# Altium PCB driver.PcbDoc
Units mil, origin at the board's own origin, x right, y up, seen from the top; angles counter-clockwise.
Board outline 6000 x 4000 mil, 2 copper layers (Top Layer, Bottom Layer); 169 components, 115 nets, 486 pads, 583 vias.
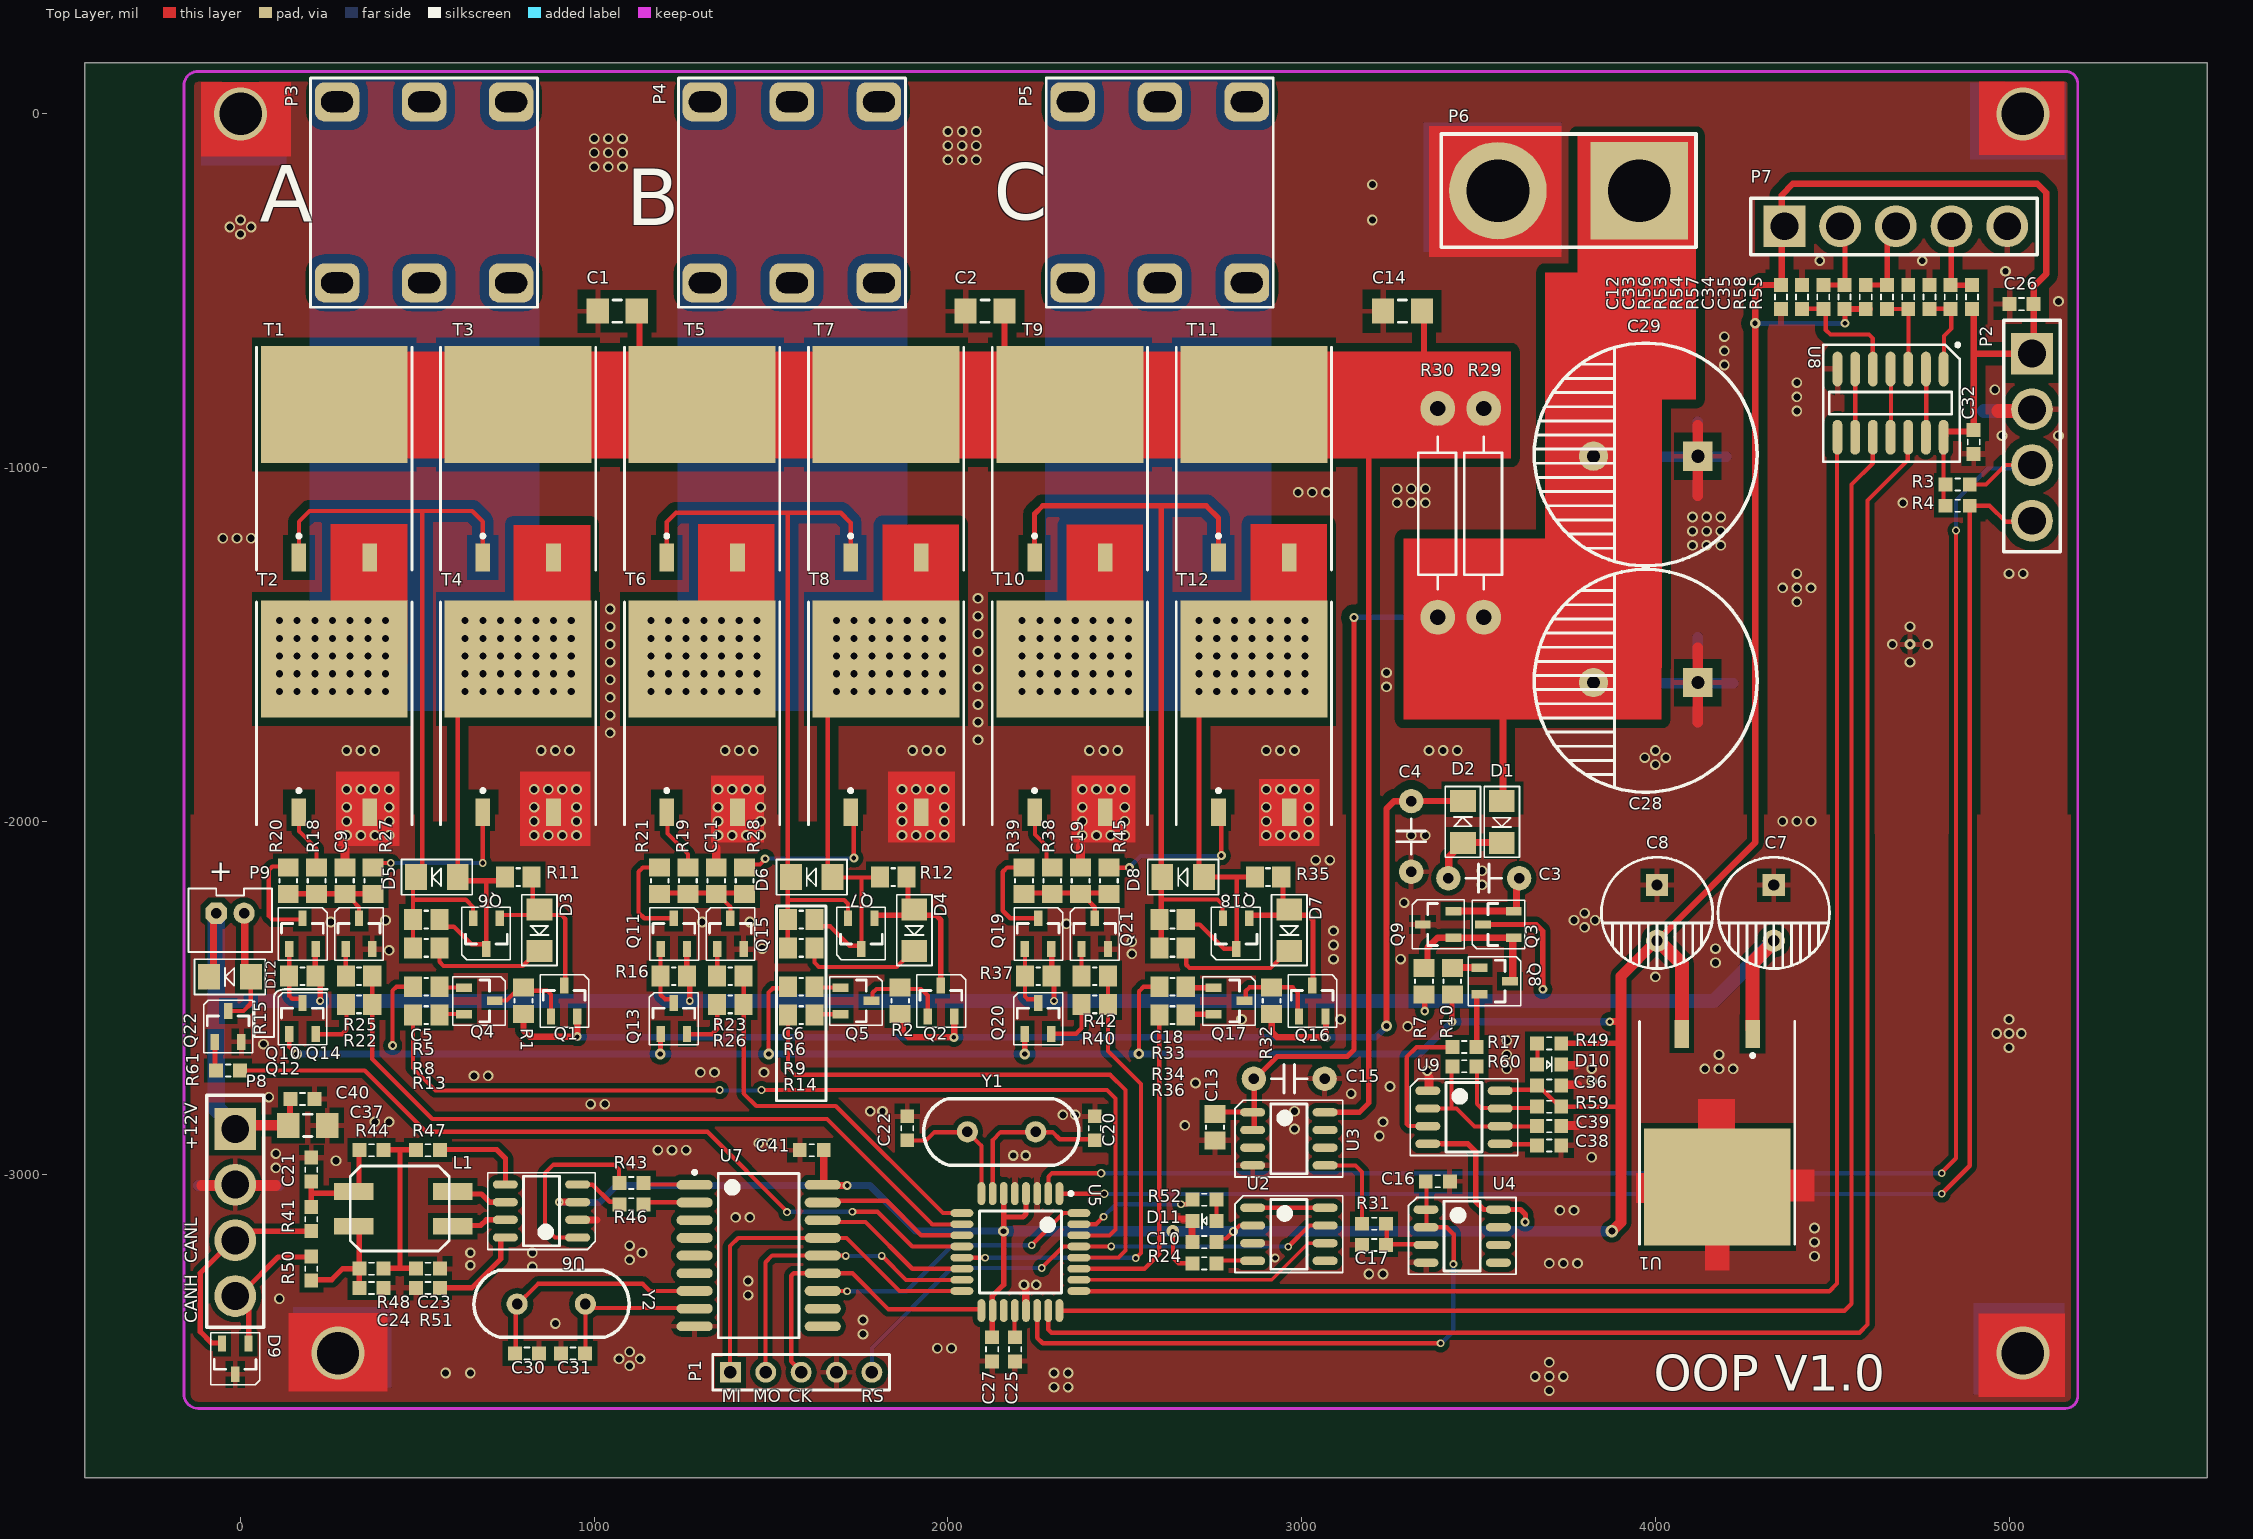
[diagram p0: Top Layer view]
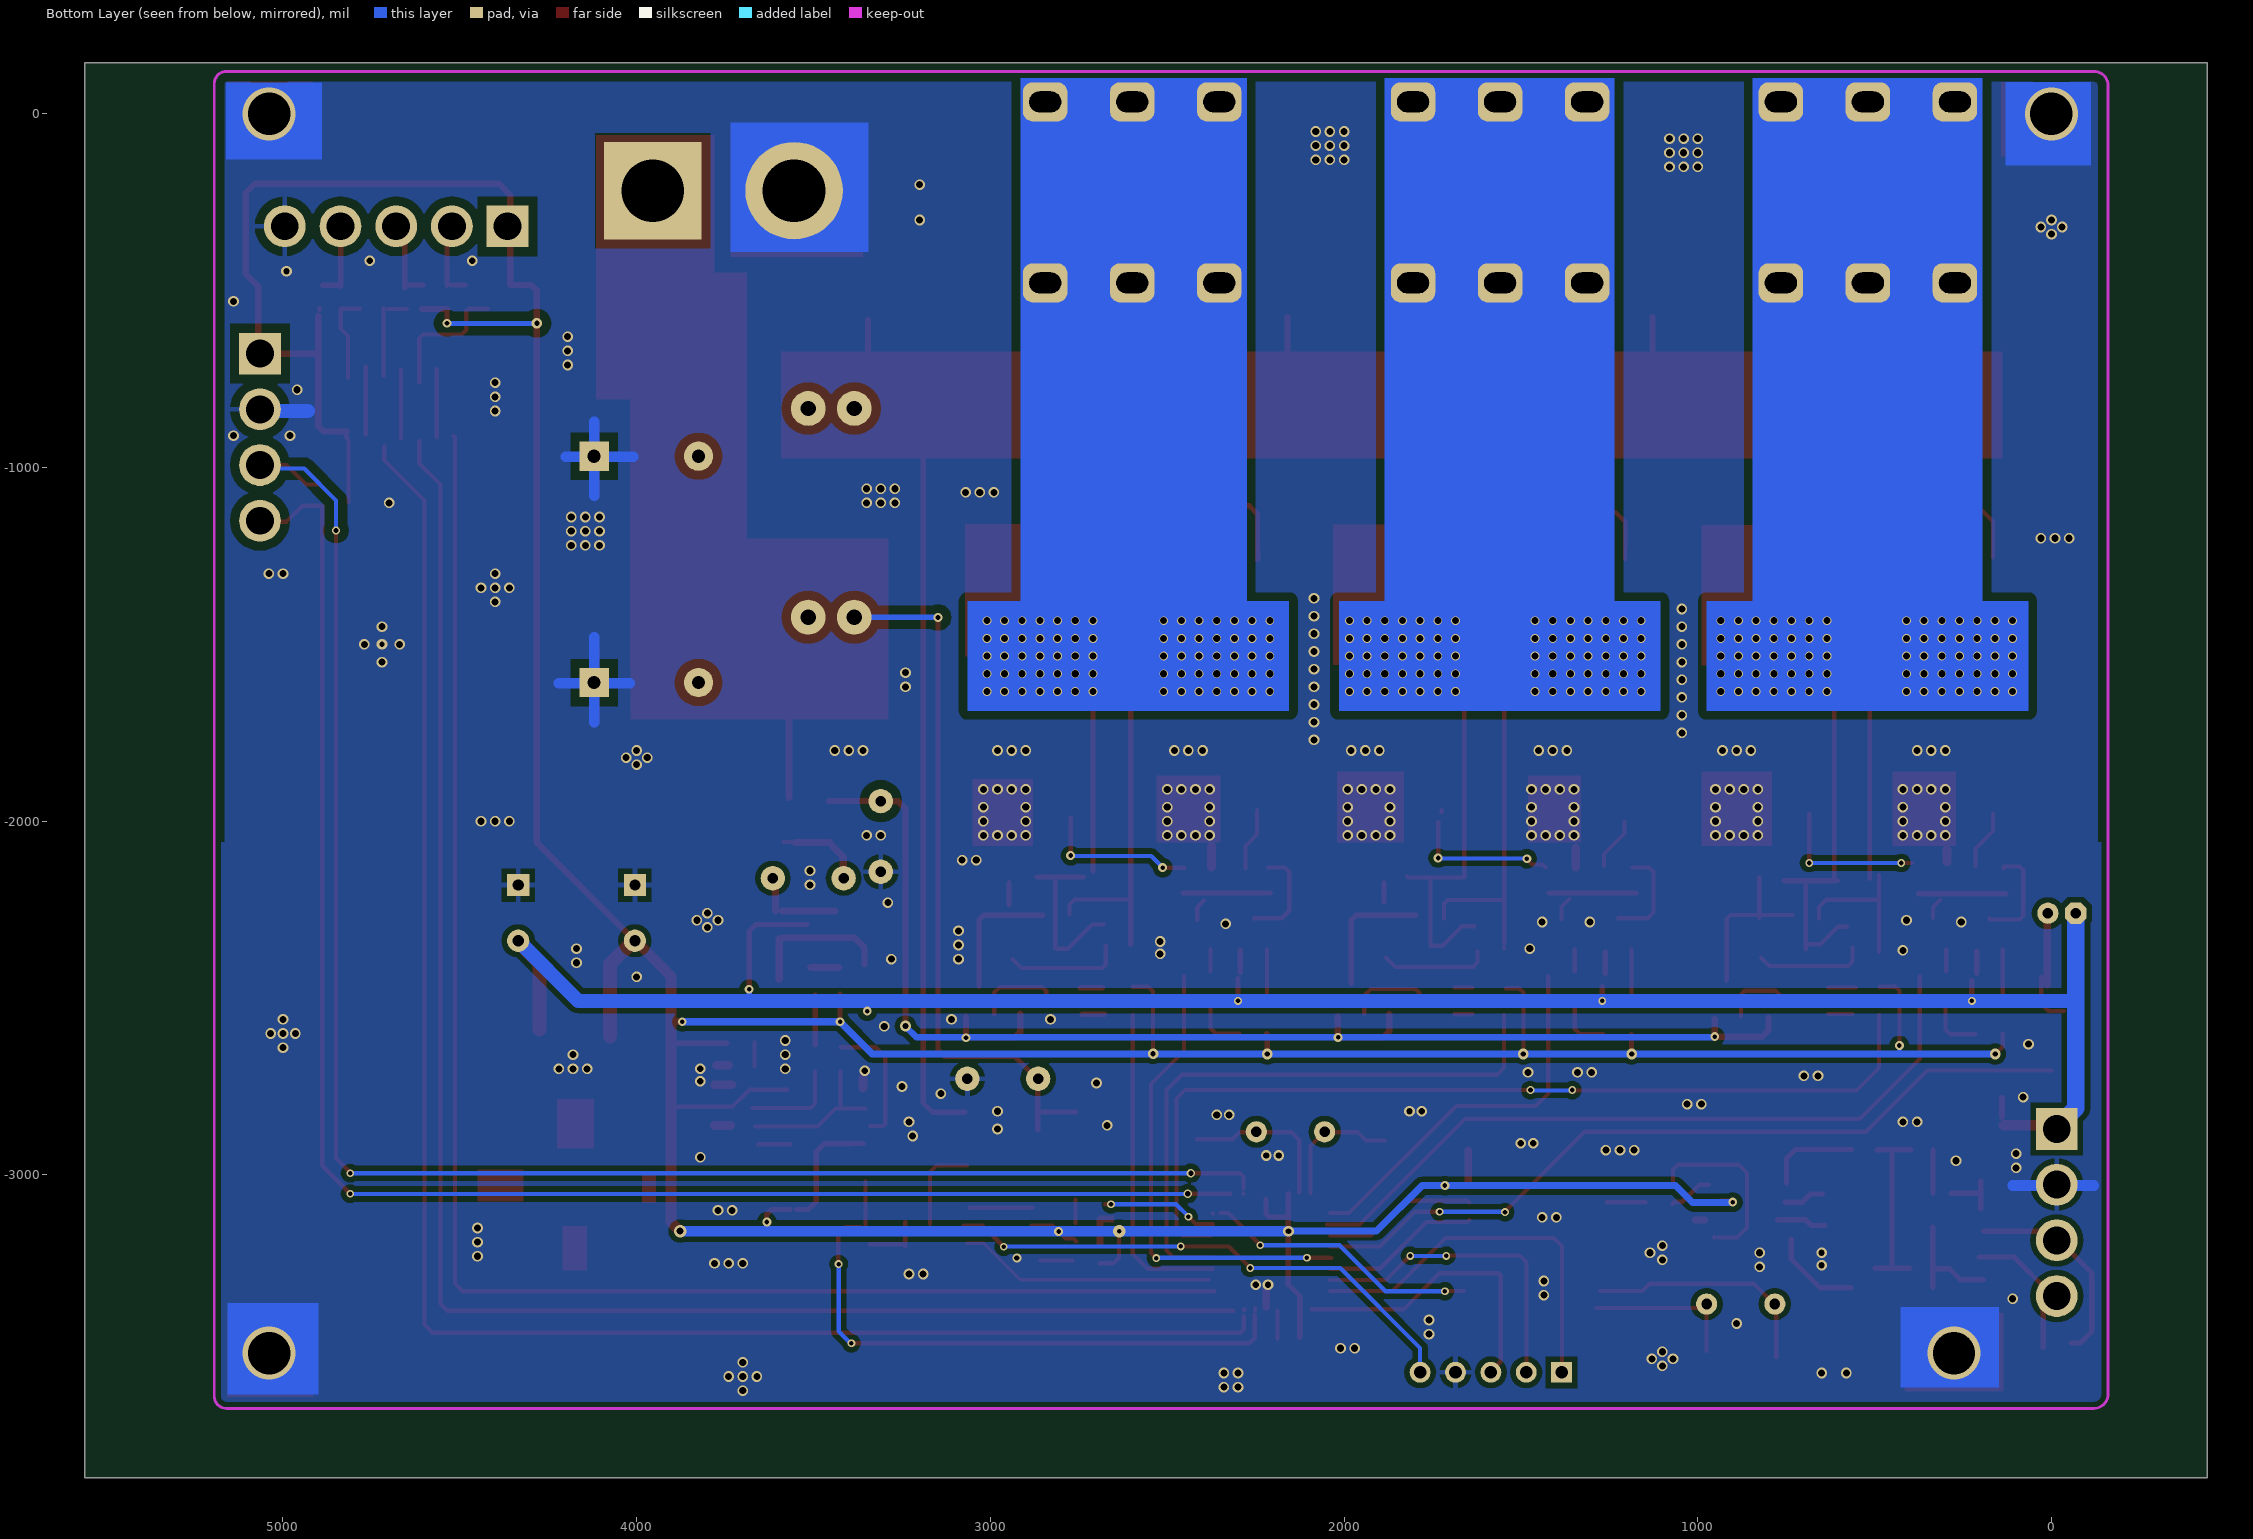
[diagram p1: Bottom Layer view, seen from below]

## Layer stack, top to bottom
Top Layer: signal copper 1.4
Dielectric: dielectric 12.6, FR-4, Dk 4.8
Bottom Layer: signal copper 1.4

## Board outline
-440,-3856 5560,-3856 5560,144 -440,144

## Design rules (kind name [scope] priority, off if disabled: settings)
Clearance [All] p1 off: gap=13.78
ComponentClearance [All] p1: gap=0 collisioncheckmode=3 verticalgap=0
HoleSize [All] p1: absolutevalues=TRUE maxlimit=200 minlimit=1 maxpercent=80.000 minpercent=20.000
PolygonConnect [All] p1: connectstyle=Relief reliefconductorwidth=15 reliefentries=4 polygonreliefangle="90 Angle"
RoutingVias [All] p1: holewidth=13 width=22 viastyle="Through Hole" minholewidth=10 minwidth=15 maxholewidth=200 maxwidth=250
SolderMaskExpansion [All] p1: expansion=4
TestPointUsage [All] p1: valid=0 allowmultiple=FALSE
Testpoint [All] p1: side=15 testpointundercomponent=TRUE minsize=40 maxsize=100 preferedsize=60 minholesize=0 maxholesize=40 preferedholesize=32 testpointgrid=1 style=1023 order=0-112345678
Width [All] p1: maxlimit=150 minlimit=10 preferedwidth=10 minimp=50.000000 maximp=50.000000 favimp=50.000000
17 further rules are at their usual default settings.

## Components (designator, comment, footprint, x,y, rotation, side; value= is the part's Value field where it differs from the comment)
C1 "Cap" 3216[1206] 1065,-558 r180 top
C2 "Cap" 3216[1206] 2105,-558 r180 top
C3 "Cap" C-5.08 3415,-2161 r0 top
C4 "Cap" C-5.08 3310,-1943 r270 top
C5 "Cap" R0805 525,-2278 r0 top
C6 "Cap" R0805 1585,-2278 r0 top
C7 "Cap Pol1" C8X4 4335,-2338 r90 top
C8 "Cap Pol1" C8X4 4005,-2338 r90 top
C9 "Cap" R0805 295,-2168 r270 top
C10 "Cap" 0603 2725,-3190 r0 top
C11 "Cap" R0805 1345,-2168 r270 top
C12 "Cap" 0603 4355,-518 r90 top
C13 "Cap" R0805 2755,-2865 r90 top
C14 "Cap" 3216[1206] 3285,-558 r180 top
C15 "Cap" C-5.08 2865,-2728 r0 top
C16 "Cap" 0603 3385,-3018 r180 top
C17 "Cap" 0603 3205,-3198 r0 top
C18 "Cap" R0805 2635,-2278 r0 top
C19 "Cap" R0805 2375,-2168 r270 top
C20 "Cap" 0603 2415,-2868 r90 top
C21 "Cap" 0603 200,-2985 r270 top
C22 "Cap" 0603 1885,-2868 r90 top
C23 "Cap" 0603 530,-3265 r180 top
C24 "Cap" 0603 370,-3320 r180 top
C25 "Cap" 0603 2190,-3493 r270 top
C26 "Cap" 0603 5035,-538 r0 top
C27 "Cap" 0603 2125,-3493 r90 top
C28 "Cap Pol1" C16-7.5 3825,-1608 r0 top
C29 "Cap Pol1" C16-7.5 3825,-968 r0 top
C30 "Cap" 0603 810,-3505 r0 top
C31 "Cap" 0603 940,-3505 r180 top
C32 "Cap" 0603 4900,-928 r270 top
C33 "Cap" 0603 4415,-518 r270 top
C34 "Cap" 0603 4715,-518 r270 top
C35 "Cap" 0603 4775,-518 r270 top
C36 "Cap" 0603 3700,-2747 r0 top
C37 "Cap" 3216[1206] 190,-2860 r0 top
C38 "Cap" 0603 3700,-2917 r0 top
C39 "Cap" 0603 3700,-2862 r0 top
C40 "Cap" 0603 175,-2785 r180 top
C41 "Cap" 0603 1615,-2930 r0 top
D1 "Diode" LL34 3566,-2002 r270 top
D2 "Diode" LL34 3456,-2002 r90 top
D3 "Diode" LL34 845,-2308 r270 top
D4 "Diode" LL34 1905,-2308 r270 top
D5 "Zener diode" LL34 555,-2158 r180 top
D6 "Zener diode" LL34 1615,-2158 r180 top
D7 "Diode" LL34 2965,-2308 r270 top
D8 "Zener diode" LL34 2665,-2158 r180 top
D9 "NUP2105L" SOT-23-NPN -15,-3520 r180 top
D10 "WORK" 0603-LED 3700,-2688 r0 top
D11 "FALT" 0603-LED 2725,-3130 r180 top
D12 "Diode" LL34 -30,-2440 r180 top
L1 "B82793S0513N" B82793S0513N201 600,-3145 r180 top
P1 "PROG" HDR1X5 1385,-3558 r0 top
P2 "ENC" 4P-4mm 5065,-678 r270 top
P3 "M5" M5 765,-478 r90 top
P4 "M5" M5 1805,-478 r90 top
P5 "M5" M5 2845,-478 r90 top
P6 "POW" MG7.62-2P 3620,-225 r0 top
P7 "HALL" 5P-4.0 4365,-318 r0 top
P8 "CAN" 4P-4mm -15,-2870 r270 top
P9 "FAN" PH2.0-2P 10,-2260 r0 top
Q1 "PNP" SOT-23-PNP 915,-2508 r0 top
Q2 "PNP" SOT-23-PNP 1980,-2508 r0 top
Q3 "NPN" SOT-23-NPN 3556,-2292 r90 top
Q4 "NPN" SOT-23-NPN 675,-2508 r270 top
Q5 "NPN" SOT-23-NPN 1740,-2508 r270 top
Q6 "PNP" SOT-23-PNP 695,-2318 r180 top
Q7 "PNP" SOT-23-PNP 1755,-2318 r180 top
Q8 "NPN" SOT-23-NPN 3546,-2452 r270 top
Q9 "PNP" SOT-23-PNP 3386,-2292 r90 top
Q10 "PNP" SOT-23-PNP 175,-2318 r0 top
Q11 "PNP" SOT-23-PNP 1225,-2318 r0 top
Q12 "NPN" SOT-23-NPN 175,-2558 r0 top
Q13 "NPN" SOT-23-NPN 1225,-2558 r0 top
Q14 "NPN" SOT-23-NPN 335,-2318 r0 top
Q15 "NPN" SOT-23-NPN 1385,-2318 r0 top
Q16 "PNP" SOT-23-PNP 3030,-2508 r0 top
Q17 "NPN" SOT-23-NPN 2795,-2508 r270 top
Q18 "PNP" SOT-23-PNP 2815,-2318 r180 top
Q19 "PNP" SOT-23-PNP 2255,-2318 r0 top
Q20 "NPN" SOT-23-NPN 2255,-2558 r0 top
Q21 "NPN" SOT-23-NPN 2415,-2318 r0 top
Q22 "NPN" SOT-23-NPN -35,-2580 r0 top
R1 "Res1" R0805 800,-2508 r270 top
R2 "Res1" R0805 1865,-2508 r270 top
R3 "Res1" 0603 4855,-1048 r0 top
R4 "Res1" 0603 4855,-1108 r0 top
R5 "Res1" R0805 525,-2358 r180 top
R6 "Res1" R0805 1585,-2358 r180 top
R7 "Res1" R0805 3346,-2452 r270 top
R8 "Res1" R0805 525,-2468 r180 top
R9 "Res1" R0805 1585,-2468 r180 top
R10 "Res1" R0805 3426,-2452 r270 top
R11 "Res1" R0805 785,-2158 r0 top
R12 "Res1" R0805 1845,-2158 r0 top
R13 "Res1" R0805 525,-2548 r0 top
R14 "Res1" R0805 1585,-2548 r0 top
R15 "Res1" R0805 175,-2438 r180 top
R16 "Res1" R0805 1225,-2438 r180 top
R17 "Res1" 0603 3460,-2638 r0 top
R18 "Res1" R0805 215,-2168 r270 top
R19 "Res1" R0805 1265,-2168 r270 top
R20 "Res1" R0805 135,-2168 r270 top
R21 "Res1" R0805 1185,-2168 r270 top
R22 "Res1" R0805 335,-2518 r180 top
R23 "Res1" R0805 1385,-2518 r180 top
R24 "Res1" 0603 2725,-3250 r180 top
R25 "Res1" R0805 335,-2438 r0 top
R26 "Res1" R0805 1385,-2438 r0 top
R27 "Res1" R0805 375,-2168 r270 top
R28 "Res1" R0805 1425,-2168 r270 top
R29 "" R15-1MM 3515,-928 r270 top
R30 "" R15-1MM 3385,-928 r270 top
R31 "Res1" 0603 3205,-3138 r180 top
R32 "Res1" R0805 2915,-2508 r270 top
R33 "Res1" R0805 2635,-2358 r180 top
R34 "Res1" R0805 2635,-2468 r180 top
R35 "Res1" R0805 2905,-2158 r0 top
R36 "Res1" R0805 2635,-2548 r0 top
R37 "Res1" R0805 2255,-2438 r180 top
R38 "Res1" R0805 2295,-2168 r270 top
R39 "Res1" R0805 2215,-2168 r270 top
R40 "Res1" R0805 2415,-2518 r180 top
R41 "Res Semi" 0603 200,-3125 r90 top
R42 "Res1" R0805 2415,-2438 r0 top
R43 "Res Semi" 0603 1105,-3023 r0 top
R44 "Res Semi" 0603 370,-2930 r0 top
R45 "Res1" R0805 2455,-2168 r270 top
R46 "Res Semi" 0603 1105,-3083 r180 top
R47 "Res Semi" 0603 530,-2930 r180 top
R48 "Res Semi" 0603 370,-3265 r0 top
R49 "Res1" 0603 3700,-2628 r0 top
R50 "Res Semi" 0603 200,-3265 r270 top
R51 "Res Semi" 0603 530,-3320 r0 top
R52 "Res1" 0603 2725,-3070 r180 top
R53 "Res Semi" 0603 4535,-518 r270 top
R54 "Res Semi" 0603 4595,-518 r270 top
R55 "Res Semi" 0603 4895,-518 r270 top
R56 "Res Semi" 0603 4475,-518 r90 top
R57 "Res Semi" 0603 4655,-518 r90 top
R58 "Res Semi" 0603 4835,-518 r90 top
R59 "Res1" 0603 3700,-2807 r0 top
R60 "Res1" 0603 3460,-2693 r0 top
R61 "Res Semi" 0603 -35,-2705 r0 top
T1 "CSD19536" D2PAK 265,-1038 r0 top
T2 "CSD19536" D2PAK 265,-1758 r0 top
T3 "CSD19536" D2PAK 785,-1038 r0 top
T4 "CSD19536" D2PAK 785,-1758 r0 top
T5 "CSD19536" D2PAK 1305,-1038 r0 top
T6 "CSD19536" D2PAK 1305,-1758 r0 top
T7 "CSD19536" D2PAK 1825,-1038 r0 top
T8 "CSD19536" D2PAK 1825,-1758 r0 top
T9 "CSD19536" D2PAK 2345,-1038 r0 top
T10 "CSD19536" D2PAK 2345,-1758 r0 top
T11 "CSD19536" D2PAK 2865,-1038 r0 top
T12 "CSD19536" D2PAK 2865,-1758 r0 top
U1 "L7805ACD2T-TR" D2PAK 4175,-2818 r180 top
U2 "MAX706RCSA" SOIC8 2965,-3168 r0 top
U3 "MAX4080T" SOIC8 2965,-2898 r0 top
U4 "LM358D" SOIC8 3455,-3173 r0 top
U5 "ATmega8-16AC" 32A_N 2205,-3218 r270 top
U6 "TJA1040" SOIC8 850,-3102 r180 top
U7 "MCP2515" WSO18_M 1465,-3228 r0 top
U8 "MC74HC14AD" 751A 4665,-818 r270 top
U9 "NE555D" SOIC8 3460,-2837 r0 top
Y1 "XTAL" 49SD 2055,-2878 r0 top
Y2 "XTAL(16M)" 49SD 975,-3365 r180 top

## Footprints (in the part's own frame and the unit in brackets; to place one, negate y for a bottom-side part, rotate by r counter-clockwise, add the part's x,y. Pads: shape width x height; smd on the part's side, far side on the other; paste and mask are expansions set on the pad)
4P-4mm [mm]
  rect 3x3 hole 2: 1(0,0)
  round 3 hole 2: 2(4,0) 3(8,0) 4(12,0)
  silkscreen extent -2.4,-2.03 14.22,2.03
5P-4.0 [mm]
  rect 3x3 hole 2: 1(0,0)
  round 3 hole 2: 2(4,0) 3(8,0) 4(12,0) 5(16,0)
  silkscreen extent -2.4,-2.03 18.16,2.03
32A_N [mm] "32-Pin Thin Quad Flat Pack 0.8 mm Pitch, IPC Medium Density"
  oval 1.65x0.55 smd: 1(-4.2,2.8) 2(-4.2,2) 3(-4.2,1.2) 4(-4.2,0.4) 5(-4.2,-0.4) 6(-4.2,-1.2) 7(-4.2,-2) 8(-4.2,-2.8) 17(4.2,-2.8) 18(4.2,-2) 19(4.2,-1.2) 20(4.2,-0.4) 21(4.2,0.4) 22(4.2,1.2) 23(4.2,2) 24(4.2,2.8)
  oval 0.55x1.65 smd: 9(-2.8,-4.2) 10(-2,-4.2) 11(-1.2,-4.2) 12(-0.4,-4.2) 13(0.4,-4.2) 14(1.2,-4.2) 15(2,-4.2) 16(2.8,-4.2) 25(2.8,4.2) 26(2,4.2) 27(1.2,4.2) 28(0.4,4.2) 29(-0.4,4.2) 30(-1.2,4.2) 31(-2,4.2) 32(-2.8,4.2)
  silkscreen extent -4.32,-2.95 2.95,3.75, body extent -3.5,-3.5 3.5,3.5, height 1.2
49SD [mil]
  round 60 hole 30: 1(0,0) 2(193,0)
  silkscreen extent -124,-95 315,94
0603 [mm]
  rect 1x1 smd: 1(-0.864,0) 2(0.864,0)
  silkscreen extent -0.18,-0.43 0.18,0.43
0603-LED [mm]
  rect 1x1 smd: 1(-0.864,0) 2(0.864,0)
  silkscreen extent -0.18,-0.51 0.18,0.56
751A [mm]
  oval 2.5x0.7 smd: 1(-2.45,3.81) 2(-2.45,2.54) 3(-2.45,1.27) 4(-2.45,0) 5(-2.45,-1.27) 6(-2.45,-2.54) 7(-2.45,-3.81) 8(2.45,-3.81) 9(2.45,-2.54) 10(2.45,-1.27) 11(2.45,0) 12(2.45,1.27) 13(2.45,2.54) 14(2.45,3.81)
  silkscreen extent -4.31,-4.83 4.19,4.95, body extent -2,-4.38 2,4.38, height 1.75
3216[1206] [mm] "Chip Resistor; Body 3.2 x 1.6 mm (LxW typ)"
  rect 1.6x1.8 smd: 1(-1.4,0) 2(1.4,0)
  silkscreen extent -0.3,-0.8 0.3,0.8
B82793S0513N201 [mm]
  rect 2.85x1.2 smd: 1(0,0) 2(0,-2.5) 3(7.112,-2.5) 4(7.112,0)
  silkscreen extent 0.25,-4.32 7.37,1.78
C8X4 [mm]
  round 1.6 hole 0.8: 1(0,0)
  rect 1.6x1.6 hole 0.8: 2(4,0)
  silkscreen extent -2,-4 6,4
C16-7.5 [mm]
  round 2.1 hole 0.95: 1(0,0)
  rect 2.1x2.1 hole 0.95: 2(7.5,0)
  silkscreen extent -4.25,-7.87 11.75,8.12
C-5.08 [mm]
  round 1.75 hole 0.75: 1(0,0) 2(5.08,0)
  silkscreen extent 1.27,-1.02 3.81,1.02
D2PAK [mm] "D2-PAK/TO-263-AB; 3 Leads (1 Cropped); Body 15.5 (inc. leads) x 10.5 mm (LxW max)"
  rect 1.05x2 smd: 1(-2.54,-5.5) 3(2.54,-5.5)
  rect 10.55x8.4 smd: 2(0,5.5)
  silkscreen extent -5.58,-6.4 5.58,9.6
HDR1X5 [mm] "Connector; Header; 5 Position"
  rect 1.5x1.5 hole 0.9: 1(0,0)
  round 1.5 hole 0.9: 2(2.54,0) 3(5.08,0) 4(7.62,0) 5(10.16,0)
  silkscreen extent -1.27,-1.27 11.43,1.27
LL34 [mm] "MELF Diode, 2-Leads, Body 3.3x1.6mm, IPC Medium Density"
  rect 1.575x1.85 smd: 1(-1.5,0) 2(1.5,0)
  silkscreen extent -2.54,-1.27 2.54,1.27, body extent -1.65,-0.82 1.65,0.82, height 1.65
M5 [mm]
  rrect50% 2.8x3.2 hole 1.5 slot 2.3 at 90 deg: 1(0,12.5) 1(0,6.25) 1(0,0) 1(13,12.5) 1(13,0) 1(13,6.25)
  silkscreen extent -1.75,-1.91 14.71,14.4
MG7.62-2P [mm]
  round 7 hole 4.5: 1(-1.651,0.203)
  rect 7x7 hole 4.5: 2(8.509,0.203)
  silkscreen extent -5.71,-3.86 12.57,4.27
PH2.0-2P [mil]
  oct 60x60 hole 30: 1(-78.74,0)
  round 60 hole 30: 2(0,0)
  silkscreen extent -157,-110 79,70
R15-1MM [mm]
  round 2.5 hole 1.1: 1(-2.413,0) 2(12.573,0)
  silkscreen extent -0.38,-1.4 10.55,1.3
R0805 [mm] "Chip Resistor, 2-Leads, Body 2.0x1.3mm, IPC Medium Density"
  rect 1.298x1.501 smd: 1(-0.95,0) 2(0.95,0)
  silkscreen extent -0.13,-0.64 0.13,0.64
SOIC8 [mm]
  oval 1.8x0.6 smd: 1(-2.625,1.905) 2(-2.625,0.635) 3(-2.625,-0.635) 4(-2.625,-1.905) 5(2.575,-1.905) 6(2.575,-0.635) 7(2.575,0.635) 8(2.575,1.905)
  silkscreen extent -3.89,-2.74 3.84,2.77, body extent -2.03,-2.5 1.97,2.5, height 1.76
SOT-23-NPN [mm]
  rect 0.6x1.143 smd: 1(0.95,-1.108) 2(-0.95,-1.108) 3(0,1.108)
  silkscreen extent -1.75,-1.89 1.75,1.87, body extent -1.5,-0.66 1.5,0.74, height 1.1
SOT-23-PNP [mm]
  rect 0.6x1.143 smd: 1(0.95,-1.108) 2(-0.95,-1.108) 3(0,1.108)
  silkscreen extent -1.73,-1.89 1.78,1.87, body extent -1.5,-0.66 1.5,0.74, height 1.1
WSO18_M [mm] "SOIC, 18-Leads, Body 11.6x7.5mm, Pitch 1.27mm, IPC Low Density"
  oval 2.6x0.7 smd: 1(-4.6,5.08) 2(-4.6,3.81) 3(-4.6,2.54) 4(-4.6,1.27) 5(-4.6,0) 6(-4.6,-1.27) 7(-4.6,-2.54) 8(-4.6,-3.81) 9(-4.6,-5.08) 10(4.6,-5.08) 11(4.6,-3.81) 12(4.6,-2.54) 13(4.6,-1.27) 14(4.6,0) 15(4.6,1.27) 16(4.6,2.54) 17(4.6,3.81) 18(4.6,5.08)
  silkscreen extent -4.72,-5.9 2.9,6.1, body extent -3.8,-5.95 3.8,5.95, height 2.65

## Part data
C1 C2 C3 C4 C5 C6 C9 C10 C11 C12 C13 C14 C15 C16 C17 C18 C19 C20 C21 C22 C23 C24 C25 C26 C27 C30 C31 C32 C33 C34 C35 C36 C37 C38 C39 C40 C41: "Capacitor"
C7 C8 C28 C29: "Polarized Capacitor (Radial)"
D1 D2 D3 D4 D7 D12: library part "Diode 1N5408", "3 Amp Medium Power Silicon Rectifier Diode"
D5 D6 D8: library part "D Zener", "Zener Diode"
D10 D11: library part LED2, "Typical RED, GREEN, YELLOW, AMBER GaAs LED"
L1: library part B82793S0513N201
P1 P7: library part "Header 5", "Header, 5-Pin"
P2 P8: library part "Header 4", "Header, 4-Pin"
P6 P9: library part "Header 2", "Header, 2-Pin"
Q1 Q2 Q6 Q7 Q9 Q10 Q11 Q16 Q18 Q19: library part 2N5401, "PNP General Purpose Amplifier"
Q3 Q4 Q5 Q8 Q12 Q13 Q14 Q15 Q17 Q20 Q21 Q22: library part 2N5551, "NPN General Purpose Amplifier"
R1 R2 R3 R4 R5 R6 R7 R8 R9 R10 R11 R12 R13 R14 R15 R16 R17 R18 R19 R20 R21 R22 R23 R24 R25 R26 R27 R28 R31 R32 R33 R34 R35 R36 R37 R38 R39 R40 R42 R45 R49 R52 R59 R60: "Resistor"
R29 R30: library part Res1, "Resistor"
R41 R43 R44 R46 R47 R48 R50 R51 R53 R54 R55 R56 R57 R58 R61: "Semiconductor Resistor"
T1 T2 T3 T4 T5 T6 T7 T8 T9 T10 T11 T12: library part IRF644S, "HEXFET N-Channel Power MOSFET"
U1: library part MC78M05ACDTRK, "Three-Terminal Medium Current Positive Voltage Regulator"
U2: "+3V Voltage Monitoring, Low-Cost, µP Supervisory Circuit"
U3: library part MAX4080
U4: "Dual Low-Power Operational Amplifier"
U5: "8-Bit AVR Microcontroller with 8K Bytes of In-System Programmable Flash Memory"
U8: "Hex Schmitt-Trigger Inverter"
U9: "Precision Timer"
Y1: "Crystal Oscillator"
Y2: library part XTAL, "Crystal Oscillator"

## Via types
v1: diameter 30, hole 20, Top Layer to Bottom Layer, 296 vias
v2: diameter 25, hole 20, Top Layer to Bottom Layer, 210 vias
v3: diameter 22, hole 13, Top Layer to Bottom Layer, 25 vias
v4: diameter 30, hole 18, Top Layer to Bottom Layer, 16 vias
v5: diameter 25, hole 13, Top Layer to Bottom Layer, 16 vias
v6: diameter 30, hole 15, Top Layer to Bottom Layer, 7 vias
v7: diameter 150, hole 120, Top Layer to Bottom Layer, 4 vias
v8: diameter 25, hole 15, Top Layer to Bottom Layer, 2 vias
v9: diameter 24, hole 15, Top Layer to Bottom Layer, 2 vias
v10: diameter 25, hole 14, Top Layer to Bottom Layer, 1 vias
v11: diameter 35, hole 13, Top Layer to Bottom Layer, 1 vias
v12: diameter 35, hole 20, Top Layer to Bottom Layer, 1 vias
v13: diameter 30, hole 16, Top Layer to Bottom Layer, 1 vias
v14: diameter 30, hole 17, Top Layer to Bottom Layer, 1 vias

## Nets (pads, with @x,y where several pads share a name; then routed paths per layer and width w, separated by ;. In a path a pad name is that pad's centre, name@x,y a point inside that pad or via, vN(x,y) a via of type N, cw(c..) or ccw(c..) an arc to the next point about the centre after c; other vN are vias at no path point)
+5V: C8.1 C10.2 C12.2 C26.2 C27.2 C32.1 C36.1 C41.2 P2.1 P7.1 Q12.2 Q13.2 Q20.2 R3.1 R4.1 R8.2 R9.2 R10.2 R24.2 R34.2 R49.2 R53.2 R54.2 R55.2 R59.2 U1.3 U2.2 U4.8 U5.4 U5.6 U5.18 U6.3 U7.18 U8.14 U9.4 U9.8 | length 15538.5
  Top Layer w12: Q12.2@137.99,-2601.64 Q12.2@138,-2601 ; Q12.2@138,-2600 138,-2638 v6@158,-2658 ; v5(430,-2634) 430,-2479 441,-2468 R8.2@486,-2468 ; v6@1493,-2657 1493,-2484 1505,-2472 R9.2@1542,-2472 ; v6@2540,-2658 2540,-2481 2553,-2468 R34.2 ; v11@2636,-3160 2636,-3234 2652,-3250 R24.2 ; C10.2@2757,-3188 2765,-3180 2787,-3180 2824,-3143 U2.2@2883,-3143 ; U9.8@3574,-2759 3681,-2759 3729,-2807 3900,-2807 ; R4.1@4815,-1098 U8.14@4815,-923
  Top Layer w15: v6@1187.6,-2658 Q13.2@1187.6,-2603 ; C27.2 2125,-3343 2157.76,-3310.24 U5.6 ; 2162.26,-3119 2212,-3119 2221,-3110 U5.4@2221,-3068 ; v6@2217.6,-2659.6 Q20.2@2217.6,-2612 ; Q20.2@2218.92,-2601.7 Q20.2@2219,-2600 ; U9.4@3359,-2911 3398,-2912 3470,-2912 3492,-2934 3492,-3075 3515,-3098 U4.8@3547,-3098 ; v5@3425,-2565 R10.2@3425,-2489.4 ; U4.8@3565,-3098 3619,-3098 3633,-3112 v5@3633,-3131 ; R49.2@3745,-2628 3895,-2628 ; v10@4536,-591 4536,-552 R53.2@4536,-551.88 ; U8.14@4820.58,-915.03 U8.14@4821,-911 ; R55.2@4896.91,-552.15 R55.2@4897,-551
  Top Layer w18: C8.1@4014,-2329 4283,-2060 4283,-499 4298,-484 C12.2@4356,-484 ; C12.2@4354.46,-480.38 C12.2@4357,-480 ; C12.2@4357,-478 4357,-230 4389,-198 5080,-198 5105,-223 5105,-453 5070,-488 P2.1@5070,-683 ; R53.2@4536,-551.88 R54.2@4606.12,-551.88 ; U8.14@4820,-898 4885,-898 4900,-883 4900,-713 ; 4900,-720 R55.2@4900,-571 ; 4903,-678 P2.1
  Top Layer w20: v5@902,-3077 U6.3@937,-3077 ; v6(1187,-2658) v6@1187.6,-2658 ; U7.18@1648.1,-3030 v5@1716,-3030 ; U7.18@1649,-3024 C41.2 ; C41.2@1649.96,-2930.04 C41.2@1650,-2929 ; v5@3871,-2566 3898,-2566
  Top Layer w25: C8.1@4003,-2338 C8.1@4003,-2337
  Top Layer w30: v12@3877,-3160 3903,-3134 3903,-2438 C8.1@4003,-2338
  Top Layer w40: C8.1@4008,-2337 4075,-2404 U1.3@4075,-2609
  Bottom Layer w12: 430,-2650 v5@430,-2633.74
  Bottom Layer w15: 3632,-3159 v5(3632,-3133) ; v6@4281,-593 v10@4536,-593
  Bottom Layer w20: v6@160,-2658 3334,-2658 v5@3426,-2566 ; v5@902,-3078 1015,-3078 1063,-3030 1779,-3030 1908,-3159 v13(2157,-3159) ; v5(3425,-2567) v5@3870,-2567
  Bottom Layer w30: v13(2157,-3159) v12@3876,-3159
  other v5: 2807,-3160 901,-3077 1715,-3030 3871,-2567
  other v6: 159,-2658 1493,-2658 2217,-2658 2540,-2657 4282,-592
  other v10: 4536,-592
  other v11: 2636,-3159
  other v12: 3877,-3159
+12V: C7.1 C37.1 C40.2 D12.2 P8.1 P9.1 Q3.3 Q10.1 Q11.1 Q19.1 R7.2 R15.1 R16.1 R37.1 U1.1 | length 6539.7
  Top Layer w15: R15.1@211.6,-2430.04 Q10.1@211.6,-2367.64 ; v3(225,-2508) R15.1@225,-2450.6 ; R16.1@1261.6,-2432.04 Q11.1@1261.6,-2369.64 ; v3(1270,-2508) 1270,-2468 ; R37.1@2293.4,-2427.36 Q19.1@2293.4,-2364.96 ; v3(2300,-2508) R37.1@2300,-2445.6 ; v5@3348,-2536 R7.2@3348,-2504 ; Q3.3@3518,-2292 3663,-2292 3682,-2311 v5@3682,-2474
  Top Layer w18: C37.1@140,-2836 C40.2@140,-2783
  Top Layer w20: D12.2@-76,-2461 P9.1@-76,-2251
  Top Layer w30: P8.1@-6,-2860 C37.1
  Top Layer w40: U1.1@4275,-2588 4275,-2400 C7.1@4334,-2341
  Bottom Layer w15: v5@3349,-2535 3349,-2508 ; 3682,-2498 v5(3682,-2475)
  Bottom Layer w40: -62.82,-2508 4165,-2508 C7.1
  Bottom Layer w50: P9.1 -68.74,-2811.26 -15,-2865 P8.1
  other v5: 3348,-2537
A: C5.2 D5.1 P3.1 Q6.3 R11.1 T1.3 T2.2 T3.3 T4.2 | length 992.9
  Top Layer w12: C5.2@579,-2298 603,-2298 653,-2348 Q6.3@694,-2348 ; D5.1@614.06,-2168 T4.2@614.06,-1654.06 ; Q6.3 695,-2168
  Top Layer w15: D5.1@606.06,-2168 R11.1@755.69,-2168
  other v2: 110,-1633 160,-1633 210,-1633 260,-1633 310,-1633 360,-1633 410,-1633 635,-1633 685,-1633 735,-1633 785,-1633 835,-1633 885,-1633 935,-1633 110,-1583 160,-1583 210,-1583 260,-1583 310,-1583 360,-1583 410,-1583 635,-1583 685,-1583 735,-1583 785,-1583 835,-1583 885,-1583 935,-1583 110,-1533 160,-1533 210,-1533 260,-1533 310,-1533 360,-1533 410,-1533 635,-1533 685,-1533 735,-1533 785,-1533 835,-1533 885,-1533 935,-1533 110,-1483 160,-1483 210,-1483 260,-1483 310,-1483 360,-1483 410,-1483 635,-1483 685,-1483 735,-1483 785,-1483 835,-1483 885,-1483 935,-1483 110,-1433 160,-1433 210,-1433 260,-1433 310,-1433 360,-1433 410,-1433 635,-1433 685,-1433 735,-1433 785,-1433 835,-1433 885,-1433 935,-1433
B: C6.2 D6.1 P4.1 Q7.3 R12.1 T5.3 T6.2 T7.3 T8.2 | length 979
  Top Layer w12: C6.2@1631,-2297 1667,-2297 1722,-2352 Q7.3@1755,-2352 ; T8.2@1660,-1682 1660,-2159 1819,-2159 R12.1@1822,-2156 ; Q7.3@1756,-2353 1756,-2161
  other v2: 1160,-1633 1210,-1633 1260,-1633 1310,-1633 1360,-1633 1410,-1633 1460,-1633 1685,-1633 1735,-1633 1785,-1633 1835,-1633 1885,-1633 1935,-1633 1985,-1633 1160,-1583 1210,-1583 1260,-1583 1310,-1583 1360,-1583 1410,-1583 1460,-1583 1685,-1583 1735,-1583 1785,-1583 1835,-1583 1885,-1583 1935,-1583 1985,-1583 1160,-1533 1210,-1533 1260,-1533 1310,-1533 1360,-1533 1410,-1533 1460,-1533 1685,-1533 1735,-1533 1785,-1533 1835,-1533 1885,-1533 1935,-1533 1985,-1533 1160,-1483 1210,-1483 1260,-1483 1310,-1483 1360,-1483 1410,-1483 1460,-1483 1685,-1483 1735,-1483 1785,-1483 1835,-1483 1885,-1483 1935,-1483 1985,-1483 1160,-1433 1210,-1433 1260,-1433 1310,-1433 1360,-1433 1410,-1433 1460,-1433 1685,-1433 1735,-1433 1785,-1433 1835,-1433 1885,-1433 1935,-1433 1985,-1433
BT_PWM: R17.1 U9.3 | length 373.1
  Top Layer w12: U9.3@3340,-2862 3303,-2862 3297,-2856 3297,-2667 3325,-2639 R17.1@3424,-2639
C: C18.2 D8.1 P5.1 Q18.3 R35.1 T9.3 T10.2 T11.3 T12.2 | length 957.8
  Top Layer w12: C18.2@2679,-2292 2712,-2292 2780.4,-2360.4 Q18.3@2812.04,-2360.4 ; Q18.3@2816.4,-2359.36 2816.4,-2159
  Top Layer w15: D8.1@2710,-2141 T12.2@2710,-1676 ; D8.1@2736.96,-2157.6 R35.1@2868,-2157.6
  other v2: 2210,-1633 2260,-1633 2310,-1633 2360,-1633 2410,-1633 2460,-1633 2510,-1633 2710,-1633 2760,-1633 2810,-1633 2860,-1633 2910,-1633 2960,-1633 3010,-1633 2210,-1583 2260,-1583 2310,-1583 2360,-1583 2410,-1583 2460,-1583 2510,-1583 2710,-1583 2760,-1583 2810,-1583 2860,-1583 2910,-1583 2960,-1583 3010,-1583 2210,-1533 2260,-1533 2310,-1533 2360,-1533 2410,-1533 2460,-1533 2510,-1533 2710,-1533 2760,-1533 2810,-1533 2860,-1533 2910,-1533 2960,-1533 3010,-1533 2210,-1483 2260,-1483 2310,-1483 2360,-1483 2410,-1483 2460,-1483 2510,-1483 2710,-1483 2760,-1483 2810,-1483 2860,-1483 2910,-1483 2960,-1483 3010,-1483 2210,-1433 2260,-1433 2310,-1433 2360,-1433 2410,-1433 2460,-1433 2510,-1433 2710,-1433 2760,-1433 2810,-1433 2860,-1433 2910,-1433 2960,-1433 3010,-1433
CAN_INT: U5.32 U7.12 | length 778.9
  Top Layer w12: U7.12@1661,-3328 v3@1715,-3328 ; v3@2237,-3198 2327.24,-3107.76 U5.32@2349,-3107.76 ; U5.32@2370.32,-3108.95 U5.32@2372,-3109
  Bottom Layer w12: v3@1717,-3329 1883,-3329 2013,-3199 v3(2237,-3199)
  other v3: 1715,-3329
CAN_RST: U5.11 U7.17 | length 436.1
  Top Layer w12: U7.17 1651.1,-3073 1827,-3073 1924.76,-3170.76 U5.11
CANH: D9.2 P8.4 R50.1 | length 404.2
  Top Layer w15: P8.4@9,-3358 9,-3329 106,-3232 R50.1@204,-3232 ; D9.2@23,-3487 P8.4@23,-3347
CANL: D9.1 P8.3 R41.1 | length 568.5
  Top Layer w15: D9.1@-55,-3475 -82,-3475 -114,-3443 -114,-3277 P8.3@-29,-3192 ; P8.3@-18,-3159 R41.1@192,-3159
CS: U5.14 U7.16 | length 450.4
  Top Layer w12: U7.16 1651.1,-3133 1767,-3133 1899.24,-3265.24 U5.14
CSA: C16.2 U4.1 U4.2 U5.22 | length 1740.1
  Top Layer w12: U5.22@2252,-3377 U5.22@2252.04,-3383.36 ; U5.22@2252.24,-3395 2252.24,-3460.24 2268,-3476 3392,-3476 v3@3395,-3479 ; U4.2@3353,-3145 C16.2@3353,-3019 ; U4.2@3368,-3148 3410,-3148 3430,-3168 v3@3430,-3253
  Bottom Layer w12: v3@3396,-3475 3429,-3442 v3(3429,-3252)
  other v3: 3393,-3476
FALT: R52.2 U5.31 | length 325.9
  Top Layer w12: U5.31 2418.74,-3139.26 v3(2440,-3118) ; v3@2661,-3083 R52.2@2675,-3083
  Bottom Layer w12: v3(2440,-3118) 2475,-3083 v3(2659,-3083)
FAN: R61.2 U5.12 | length 2247.2
  Top Layer w12: R61.2 351,-2705 524,-2878 1320,-2878 1545,-3103 v3(1545,-3105) ; v3(1730,-3104) 1801,-3104 1899.25,-3202.25 U5.12
  Bottom Layer w12: v3@1546,-3104 v3(1730,-3104)
GND: C1.2 C2.2 C4.2 C7.2 C8.2 C9.1 C10.1 C11.1 C12.1 C13.1 C14.2 C15.2 C16.1 C17.1 C19.1 C20.2 C21.1 C22.2 C23.1 C24.1 C25.2 C26.1 C27.1 C28.2 C29.2 C30.2 C31.2 C32.2 C33.1 C34.1 C35.1 C36.2 C37.2 C38.2 C39.2 C40.1 C41.1 D9.3 D10.2 D11.2 P1.4 P2.2 P6.1 P7.5 P8.2 Q9.3 Q14.1 Q15.1 Q21.1 Q22.1 R51.1 T2.3 T4.3 T6.3 T8.3 T10.3 T12.3 U1.2 U2.3 U3.4 U4.4 U5.3 U5.5 U5.21 U6.2 U7.9 U8.7 U9.1 | length 2318
  Top Layer w20: U6.2@980,-3127 1008,-3127 ; U5.21@2220,-3375 v4@2220,-3315
  Top Layer w25: C9.1@295,-2115 295,-2080 ; C11.1@1345,-2130 1345,-2075 ; C19.1@2375,-2130 2375,-2070 ; U9.1@3360,-2755 3360,-2725 ; C36.2@3730,-2745 3780,-2745 ; C39.2@3735,-2860 3780,-2860 ; D10.2@3740,-2690 3775,-2690
  Top Layer w30: -110,-3030 100,-3030 ; 4120,-1720 4120,-1510 ; 4120,-1080 4120,-880
  Top Layer w40: 4970,-840 P2.2@5050,-840
  Bottom Layer w30: -120,-3030 110,-3030 ; 4010,-970 4200,-970 ; 4020,-1610 4220,-1610 ; 4120,-1720 4120,-1480 ; 4120,-1080 4120,-870
  Bottom Layer w40: 4930,-840 P2.2@5080,-840
  other v1: 3700,-3610 2300,-3600 2340,-3600 3660,-3570 3700,-3570 3740,-3570 580,-3560 650,-3560 2300,-3560 2340,-3560 1100,-3540 3700,-3530 1070,-3520 1130,-3520 1100,-3500 1970,-3490 2010,-3490 1760,-3450 890,-3420 1760,-3410 110,-3350 1435,-3340 1435,-3300 3190,-3280 3230,-3280 825,-3260 3700,-3250 3740,-3250 3780,-3250 1100,-3240 4450,-3230 825,-3220 1135,-3220 1100,-3200 4450,-3190 4450,-3150 1400,-3120 1440,-3120 3730,-3100 3770,-3100 100,-2980 270,-2960 3820,-2950 100,-2940 1180,-2930 1220,-2930 1260,-2930 3220,-2890 2980,-2870 2670,-2860 380,-2850 420,-2850 3230,-2850 2325,-2830 2360,-2830 2980,-2820 990,-2800 1030,-2800 80,-2780 3140,-2770 3250,-2750 2700,-2740 660,-2720 700,-2720 1300,-2710 1340,-2710 1480,-2710 3580,-2700 4140,-2700 4180,-2700 4220,-2700 3580,-2660 4180,-2660 5000,-2640 65,-2630 3580,-2620 4965,-2600 5000,-2600 5035,-2600 3300,-2580 2830,-2560 3110,-2560 5000,-2560 4000,-2440 4170,-2400 3090,-2390 3280,-2390 2520,-2375 420,-2365 1475,-2360 4170,-2360 3090,-2350 2520,-2340 3090,-2310 3800,-2300 2335,-2290 255,-2285 1305,-2285 1440,-2285 410,-2280 3770,-2280 3830,-2280 3800,-2260 3290,-2230 3510,-2180 3510,-2140 3040,-2110 3080,-2110 300,-2040 340,-2040 380,-2040 420,-2040 830,-2040 870,-2040 910,-2040 950,-2040 1350,-2040 1390,-2040 1430,-2040 1470,-2040 1870,-2040 1910,-2040 1950,-2040 1990,-2040 2380,-2040 2420,-2040 2460,-2040 2500,-2040 2900,-2040 2940,-2040 2980,-2040 3020,-2040 3310,-2040 3350,-2040 300,-2000 420,-2000 830,-2000 950,-2000 1350,-2000 1470,-2000 1870,-2000 1990,-2000 2380,-2000 2500,-2000 2900,-2000 3020,-2000 4360,-2000 4400,-2000 4440,-2000 300,-1960 420,-1960 830,-1960 950,-1960 1350,-1960 1470,-1960 1870,-1960 1990,-1960 2380,-1960 2500,-1960 2900,-1960 3020,-1960 300,-1910 340,-1910 380,-1910 420,-1910 830,-1910 870,-1910 910,-1910 950,-1910 1350,-1910 1390,-1910 1430,-1910 1470,-1910 1870,-1910 1910,-1910 1950,-1910 1990,-1910 2380,-1910 2420,-1910 2460,-1910 2500,-1910 2900,-1910 2940,-1910 2980,-1910 3020,-1910 4000,-1840 3970,-1820 4030,-1820 300,-1800 340,-1800 380,-1800 850,-1800 890,-1800 930,-1800 1370,-1800 1410,-1800 1450,-1800 1900,-1800 1940,-1800 1980,-1800 2400,-1800 2440,-1800 2480,-1800 2900,-1800 2940,-1800 2980,-1800 3360,-1800 3400,-1800 3440,-1800 4000,-1800 2085,-1770 1045,-1750 2085,-1720 1045,-1700 2085,-1670 1045,-1650 2085,-1620 3240,-1620 1045,-1600 3240,-1580 2085,-1570 1045,-1550 4720,-1550 2085,-1520 1045,-1500 4670,-1500 4770,-1500 2085,-1470 1045,-1450 4720,-1450 2085,-1420 1045,-1400 4400,-1380 2085,-1370 4360,-1340 4400,-1340 4440,-1340 4400,-1300 5000,-1300 5040,-1300 4105,-1220 4145,-1220 4185,-1220 -50,-1200 -10,-1200 30,-1200 4105,-1180 4145,-1180 4185,-1180 4105,-1140 4145,-1140 4185,-1140 3270,-1100 3310,-1100 3350,-1100 4700,-1100 2990,-1070 3030,-1070 3070,-1070 3270,-1060 3310,-1060 3350,-1060 4980,-910 5140,-910 4400,-840 4400,-800 4960,-780 4400,-760 4195,-710 4195,-670 4195,-630 5140,-530 0,-340 -30,-320 30,-320 0,-300 3200,-300 3200,-200 1000,-150 1040,-150 1080,-150 2000,-130 2040,-130 2080,-130 1000,-110 1040,-110 1080,-110 2000,-90 2040,-90 2080,-90 1000,-70 1040,-70 1080,-70 2000,-50 2040,-50 2080,-50
  other v4: 2215,-3310 2250,-3310 650,-3255 650,-3220 2185,-2945 2220,-2945 1465,-2910 1500,-2910 1780,-2820 1815,-2820 3820,-2735 3355,-2705 3820,-2700 4990,-445 4465,-415 4755,-415
  other v6: 4720,-1500
  other v7: 275.59,-3503.94 5039.37,-3503.94 0,0 5039.37,0
  other v8: 2925,-3235
HA: U5.23 U8.12 | length 4901.3
  Top Layer w12: U5.23@2282,-3379 U5.23@2282.18,-3383.42 ; U5.23@2283.74,-3399.74 2283.74,-3436.74 2293,-3446 4577,-3446 4600,-3423 4600,-1093 4714,-979 U8.12@4714,-940
HB: U5.24 U8.10 | length 4713.9
  Top Layer w12: U5.24@2313.24,-3384 4535,-3384 4555,-3364 4555,-1048 4615,-988 U8.10@4615,-925
HC: U5.25 U8.8 | length 4544.7
  Top Layer w12: U5.25@2367,-3329 U5.25@2370.37,-3328.94 ; U5.25@2379,-3329 4492,-3329 4514,-3307 4514,-914 U8.8@4517,-911
M8_DOG: U2.6 U5.26 | length 728.3
  Top Layer w10: U5.26@2381,-3296.74 2915.26,-3296.74 3019,-3193 U2.6
M8_RST: P1.5 U2.7 U5.29 | length 1506.1
  Top Layer w10: U5.29@2367,-3202 U5.29@2370.36,-3202.02
  Top Layer w12: v3(2265,-3263) 2326,-3202 v3(2462,-3202) ; v3(2962,-3203) 3022,-3143 U2.7@3075,-3143
  Bottom Layer w12: P1.5 1785,-3489 2011,-3263 v3(2265,-3263) ; v3@2461,-3202 v3@2961,-3202
MISO: P1.1 U5.16 U7.15 | length 1087.4
  Top Layer w12: P1.1@1384,-3561 1384,-3201 1407,-3178 1713,-3178 1863.24,-3328.24 U5.16
MOSI: P1.2 U5.15 U7.14 | length 908.3
  Top Layer w12: P1.2@1484,-3561 1484,-3247 1503,-3228 1712,-3228 v3@1712,-3230 ; v3@1813.5,-3228.5 1881.74,-3296.74 U5.15
  Bottom Layer w12: v3(1711,-3229) v3(1813,-3229)
NetC3_1: C3.1 D1.2 D2.1 | length 220.1
  Top Layer w12: D1.2@3565.91,-2058.78 D1.2@3585,-2058
  Top Layer w20: C3.1@3416,-2162 3416,-2101 D2.1@3445,-2072 ; D2.1@3454,-2060 D1.2@3552.94,-2060
NetC3_2: C3.2 Q3.1 Q9.1 | length 247.9
  Top Layer w20: Q9.1@3440,-2254 Q3.1@3588.94,-2254 ; Q3.1@3607,-2253 C3.2@3607,-2154.06
NetC5_1: C5.1 D5.2 Q6.1 R5.2 T1.1 T3.1 | length 2216.2
  Top Layer w12: T1.1 165,-1153 195,-1123 655,-1123 685,-1153 T3.1 ; R5.2@487.6,-2370 D5.2@487.6,-2152 ; 487.6,-2222 637,-2222 657.6,-2242.6 Q6.1 ; D5.2@514,-2163 514,-1123
NetC6_1: C6.1 D6.2 Q7.1 R6.2 T5.1 T7.1 | length 2171.1
  Top Layer w12: T5.1@1206,-1258 1205.93,-1254.52 1205,-1210 1205,-1154 1231,-1128 1697,-1128 1725,-1156 T7.1@1725,-1251 ; R6.2@1547,-2346 1547,-1131 ; R6.2@1548,-2360 R6.2@1547.98,-2358 ; 1550,-2223 1707,-2223 1717.6,-2233.6 Q7.1
NetC9_2: C9.2 Q14.3 R18.2 R20.2 R27.2 | length 304.9
  Top Layer w12: C9.2@315,-2223 335,-2243 Q14.3@335,-2273
  Top Layer w15: R20.2@128.36,-2205 R27.2@375,-2205
NetC11_2: C11.2 Q15.3 R19.2 R21.2 R28.2 | length 313.5
  Top Layer w12: C11.2@1363,-2220 1385,-2242 Q15.3@1385,-2278
  Top Layer w15: R21.2@1173.64,-2203 R28.2@1420,-2203
NetC17_2: C17.2 R31.1 U4.3 | length 160
  Top Layer w12: C17.2@3241,-3202 R31.1@3241,-3133 ; C17.2@3251,-3196 U4.3@3342,-3196
NetC18_1: C18.1 D8.2 Q18.1 R33.2 T9.1 T11.1 | length 2228.9
  Top Layer w12: 2604,-2221 2762,-2221 2776,-2235 Q18.1@2776,-2264
  Top Layer w15: T9.1@2244,-1260 2244.11,-1254.52 2245,-1210 2245,-1131 2268,-1108 2730,-1108 2765,-1143 T11.1@2765,-1255 ; R33.2@2603,-2348 2603,-1110.96
NetC19_2: C19.2 Q21.3 R38.2 R39.2 R45.2 | length 308.2
  Top Layer w12: C19.2@2397,-2225 2415,-2243 Q21.3@2415,-2279.4
  Top Layer w15: R39.2@2208.64,-2203 R45.2@2455,-2203
NetC20_1: C20.1 U5.7 Y1.2 | length 454.4
  Top Layer w12: U5.7@2127,-3049 2127,-2901 2149,-2879 2296,-2879 2316,-2899 C20.1@2416,-2899
NetC21_2: C21.2 L1.3 R41.2 R44.1 | length 284
  Top Layer w15: R41.2@200,-3096 C21.2@200,-3017 ; 201,-3052 L1.3@283,-3052 ; L1.3@335,-3052 R44.1@335,-2929
NetC22_1: C22.1 U5.8 Y1.1 | length 371.6
  Top Layer w12: C22.1@1884,-2903 1938,-2903 1962,-2879 2056,-2879 2094.76,-2917.76 U5.8
NetC23_2: C23.2 R44.2 R47.2 R48.2 | length 523
  Top Layer w15: R44.2@398,-2929 R47.2@493,-2929 ; R48.2@400,-3264 C23.2@498,-3264 ; 451,-3262 451,-2932
NetC24_2: C24.2 L1.4 R48.1 R50.2 | length 316.8
  Top Layer w15: R50.2@192,-3296 258,-3296 289,-3265 R48.1@325,-3265 ; C24.2@336,-3318 L1.4@336,-3147
NetC25_1: C25.1 U5.20 | length 79
  Top Layer w12: C25.1@2188.24,-3463 U5.20@2188.24,-3384
NetC30_1: C30.1 U7.7 Y2.2 | length 677.4
  Top Layer w12: C30.1@778,-3516 778,-3371 841,-3308 1137,-3308 1157,-3328 U7.7@1276,-3328
NetC31_1: C31.1 U7.8 Y2.1 | length 443
  Top Layer w12: C31.1@975,-3497 Y2.1@975,-3364 ; Y2.1@977,-3376 U7.8@1287,-3376
NetC33_2: C33.2 R56.1 U8.5 | length 375.4
  Top Layer w12: C33.2@4421,-551 R56.1@4475,-551 ; R56.1@4482,-557 4482,-611 4495,-624 4604,-624 4615,-635 U8.5@4615,-759.46
NetC34_2: C34.2 R57.1 U8.3 | length 246.5
  Top Layer w12: R57.1@4650,-552 C34.2@4704,-552 ; U8.3@4716,-741.46 C34.2@4716,-549
NetC35_2: C35.2 R58.1 U8.1 | length 256.2
  Top Layer w12: C35.2@4782,-551 R58.1@4836,-551 ; U8.1@4816,-746.46 4816,-628 4837,-607 R58.1@4837,-553
NetC38_1: C38.1 U9.5 | length 91
  Top Layer w12: U9.5@3566,-2913 C38.1@3657,-2913
NetC39_1: C39.1 R60.1 U9.2 U9.6 | length 435.1
  Top Layer w12: U9.2@3353.06,-2812 3438,-2812 3489,-2863 C39.1@3665,-2863 ; 3424,-2809 R60.1@3424,-2707
NetD3_1: D3.1 Q1.3 Q6.2 R11.2 | length 479.6
  Top Layer w12: Q6.2@733,-2265 907,-2265 918,-2276 Q1.3@918,-2451 ; D3.1@826,-2273 R11.2@826,-2158
NetD3_2: D3.2 R5.1 | length 312.3
  Top Layer w12: R5.1 562.4,-2397.4 574,-2409 798,-2409 D3.2@821,-2386
NetD4_1: D4.1 Q2.3 Q7.2 R12.2 | length 421.4
  Top Layer w15: Q7.2@1797,-2266 1967,-2266 1980,-2279 Q2.3@1980,-2458 ; D4.1@1887,-2228 R12.2@1887,-2174
NetD4_2: D4.2 R6.1 | length 305
  Top Layer w12: R6.1@1622.4,-2369 1622.4,-2399.4 1635,-2412 1855,-2412 D4.2@1881,-2386
NetD7_1: D7.1 Q16.3 Q18.2 R35.2 | length 436
  Top Layer w15: Q18.2@2851.96,-2265.6 3018.6,-2265.6 3032,-2279 Q16.3@3032,-2467 ; D7.1@2947.6,-2236.04 R35.2@2947.6,-2173.64
NetD7_2: D7.2 R33.1 | length 331.6
  Top Layer w12: R33.1@2673.6,-2351.64 2673.6,-2405.6 2683,-2415 2912,-2415 D7.2@2937,-2390
NetD9_1: 
NetD10_1: D10.1 R49.1 | length 68
  Top Layer w12: D10.1@3667,-2693 R49.1@3667,-2625
NetD11_1: D11.1 R52.1 | length 66
  Top Layer w12: D11.1@2759,-3136 R52.1
NetD12_1: D12.1 P9.2 Q22.3 | length 358.5
  Top Layer w12: Q22.3 8.64,-2536.36 29.06,-2515.94 D12.1
  Top Layer w20: D12.1@12,-2463 P9.2@12,-2253
NetL1_1: L1.1 U6.7 | length 139.6
  Top Layer w15: L1.1@641,-3143 679,-3143 695,-3127 U6.7@774,-3127
NetL1_2: L1.2 U6.6 | length 114.5
  Top Layer w15: L1.2@648,-3054 681,-3054 704,-3077 U6.6@753,-3077
NetP7_2: P7.2 R53.1 R56.2 | length 198.5
  Top Layer w15: R56.2@4484,-484 R53.1@4526,-484 ; R53.1@4536,-484.46 P7.2@4536,-328
NetP7_3: P7.3 R54.1 R57.2 | length 234.5
  Top Layer w15: R54.1@4603,-484 R57.2@4645,-484 ; R57.2@4656,-491.46 P7.3@4656,-299
NetP7_4: P7.4 R55.1 R58.2 | length 234.5
  Top Layer w15: R58.2@4837,-487.46 P7.4@4837,-295 ; R58.2@4846,-485 R55.1@4888,-485
NetQ1_2: Q1.2 Q4.3 R1.1 | length 240.3
  Top Layer w12: Q4.3@715.36,-2507 752,-2507 780,-2479 867,-2479 877.6,-2489.6 Q1.2
NetQ2_2: Q2.2 Q5.3 R2.1 | length 246.3
  Top Layer w12: Q5.3@1783.5,-2506.04 Q5.3@1784,-2506 ; Q5.3@1787,-2511.4 1787,-2485 1798,-2474 1924,-2474 1943,-2493 Q2.2@1943,-2544
NetQ3_2: Q3.2 Q8.3 Q9.2 R7.1 | length 408.6
  Top Layer w18: R7.1@3356,-2405 3356,-2357 3384,-2329 Q3.2@3590,-2329
  Top Layer w20: Q8.3@3597,-2448 Q3.2@3597,-2333
NetQ4_1: Q4.1 R13.2 | length 69
  Top Layer w12: R13.2@562.36,-2545 Q4.1@631.36,-2545
NetQ4_2: Q4.2 R8.1 | length 78
  Top Layer w12: R8.1@553.36,-2470 Q4.2@631.36,-2470
NetQ5_1: Q5.1 R14.2 | length 51
  Top Layer w12: R14.2@1637,-2546 Q5.1@1688,-2546
NetQ5_2: Q5.2 R9.1 | length 51
  Top Layer w12: R9.1@1637,-2470 Q5.2@1688,-2470
NetQ8_1: Q8.1 R17.2 | length 139.9
  Top Layer w15: R17.2@3495,-2632 Q8.1@3495,-2492.06
NetQ8_2: Q8.2 R10.1 | length 79.9
  Top Layer w20: R10.1@3428,-2414 Q8.2@3507.94,-2414
NetQ10_2: Q10.2 Q12.3 R15.2 | length 164.7
  Top Layer w12: Q10.2@138,-2361.6 138,-2494 146,-2502 Q12.3@167,-2502
NetQ10_3: Q10.3 R20.1 | length 298.7
  Top Layer w12: R20.1@135,-2128 134.83,-2128.01 134.84,-2130.6 134.86,-2132.86 130.1,-2128.1 89.9,-2128.1 80,-2138 80,-2268 90,-2278 175,-2278 Q10.3
NetQ11_2: Q11.2 Q13.3 R16.2 | length 167.5
  Top Layer w12: Q11.2 1187.6,-2490.6 1200,-2503 Q13.3@1221,-2503
NetQ11_3: Q11.3 R21.1 | length 286.9
  Top Layer w12: R21.1 1137.4,-2130.6 1125,-2143 1125,-2258 1141.36,-2274.36 Q11.3
NetQ12_1: Q12.1 R22.2 | length 162.6
  Top Layer w12: Q12.1@215,-2602 287,-2602 299.6,-2589.4 R22.2@299.6,-2516.64
NetQ13_1: Q13.1 R23.2 | length 157.4
  Top Layer w12: Q13.1@1267,-2602 1333,-2602 1347.6,-2587.4 R23.2@1347.6,-2516.64
NetQ14_2: Q14.2 R25.1 | length 62.4
  Top Layer w12: R25.1@297.6,-2424.04 Q14.2
NetQ15_2: Q15.2 R26.1 | length 62.4
  Top Layer w12: R26.1@1347.6,-2424.04 Q15.2
NetQ16_2: Q16.2 Q17.3 R32.1 | length 247.3
  Top Layer w12: Q17.3@2842,-2508 2842,-2480 2852.4,-2469.6 2974.6,-2469.6 2989,-2484 Q16.2@2989,-2546
NetQ17_1: Q17.1 R36.2 | length 62.4
  Top Layer w15: R36.2@2677.96,-2545.6 Q17.1@2740.36,-2545.6
NetQ17_2: Q17.2 R34.1 | length 62.4
  Top Layer w15: R34.1@2683.96,-2470.6 Q17.2@2746.36,-2470.6
NetQ19_2: Q19.2 Q20.3 R37.2 | length 165.4
  Top Layer w12: Q19.2 2217.6,-2495.6 2225,-2503 Q20.3@2246,-2503
NetQ19_3: Q19.3 R39.1 | length 284
  Top Layer w12: R39.1 2167.4,-2130.6 2155,-2143 2155,-2253 2176.36,-2274.36 Q19.3
NetQ20_1: Q20.1 R40.2 | length 156.8
  Top Layer w12: Q20.1@2296,-2601 2362,-2601 2377.6,-2585.4 R40.2@2377.6,-2516.64
NetQ21_2: Q21.2 R42.1 | length 62.4
  Top Layer w12: R42.1@2377.6,-2424.04 Q21.2
NetQ22_2: Q22.2 R61.1 | length 95.6
  Top Layer w15: R61.1@-72.4,-2715.64 Q22.2@-72.4,-2620
NetR18_1: R18.1 T2.1 | length 170.7
  Top Layer w12: T2.1@165,-1978 165,-2028 215,-2078 R18.1@215,-2128
NetR19_1: R19.1 T6.1 | length 149
  Top Layer w12: T6.1@1207,-2001 1207,-2035 1265,-2093 R19.1@1265,-2126
NetR24_1: R24.1 U2.4 | length 91
  Top Layer w12: R24.1@2768,-3242 U2.4@2859,-3242
NetR27_1: R27.1 T4.1 | length 430
  Top Layer w12: R27.1@395,-2118 v3(425,-2118) ; v3(685,-2118) T4.1@685,-1978
  Bottom Layer w12: v3(425,-2118) v3(685,-2118)
NetR28_1: R28.1 T8.1 | length 415.7
  Top Layer w12: R28.1@1430,-2130.6 1438.6,-2122 1469,-2122 1480,-2111 v5@1480,-2109 ; T8.1@1724,-1969 T8.1@1724.11,-1974.55 ; v5(1734,-2104) T8.1@1734,-2002
  Bottom Layer w12: v5@1485,-2105 v5@1733,-2105
  other v5: 1483,-2106
NetR31_2: R31.2 U3.5 | length 258.5
  Top Layer w12: U3.5 3152,-2973 3171,-2992 R31.2
NetR38_1: R38.1 T10.1 | length 177.5
  Top Layer w12: T10.1@2246.4,-1968.96 2246.4,-2037.4 2279,-2070 R38.1@2279,-2133
NetR43_1: R43.1 U6.1 | length 515
  Top Layer w12: U6.1@942,-3177 889,-3177 861,-3149 861,-2995 885,-2971 1056,-2971 1070,-2985 R43.1@1070,-3028 ; U6.1@953.34,-3176.02 U6.1@954,-3176
NetR43_2: R43.2 U7.1 | length 111
  Top Layer w12: R43.2@1150,-3027 U7.1@1261,-3027
NetR45_1: R45.1 T12.1 | length 442.1
  Top Layer w12: R45.1@2451.64,-2131.4 v5@2514.04,-2131.4 ; v5(2773,-2097) T12.1@2773,-1989.6
  Bottom Layer w12: v5@2513,-2130 2545,-2098 v5@2772,-2098
  other v5: 2513,-2131
NetR46_1: R46.1 U7.2 | length 111
  Top Layer w12: R46.1@1147,-3077 U7.2@1258,-3077
NetR46_2: R46.2 U6.4 | length 125.8
  Top Layer w12: U6.4@969,-3028 996,-3028 1044,-3076 1065,-3076 R46.2@1072,-3083
NetR47_1: R47.1 U6.5 | length 265.4
  Top Layer w15: R47.1@565,-2928 724,-2928 749,-2953 U6.5@749,-3024
NetR51_2: R51.2 U6.8 | length 258
  Top Layer w15: R51.2@567,-3319 654,-3319 736,-3237 U6.8@736,-3182
NetR59_1: R59.1 R60.2 U9.7 | length 273
  Top Layer w12: R60.2@3496,-2708 3496,-2799 3508,-2811 R59.1@3673,-2811
NetU2_1: U2.1 U2.8 | length 179
  Top Layer w12: U2.1@2880,-3093 U2.8@3059,-3093
NetU8_2: U8.2 U8.13 | length 192.5
  Top Layer w12: U8.13@4766,-906.46 U8.2@4766,-714
NetU8_4: U8.4 U8.11 | length 192.5
  Top Layer w12: U8.11@4666,-916.46 U8.4@4666,-724
NetU8_6: U8.6 U8.9 | length 192.5
  Top Layer w12: U8.9 U8.6@4565,-722
QEA: P2.4 R4.2 U5.1 | length 4652.1
  Top Layer w12: U5.1@2321.24,-3053 v9@2443,-3053 ; v3(4810,-3053) 4889,-2974 R4.2 4945,-1108 4990,-1153 P2.4@5055,-1153
  Bottom Layer w12: v9@2442,-3054 v3@4810,-3054
  other v9: 2442,-3053
QEB: P2.3 R3.2 U5.2 | length 4898.1
  Top Layer w12: U5.2@2284,-3054 U5.2@2283.99,-3052.64 ; U5.2@2284,-3039 2284,-3005 2294,-2995 v9(2433,-2995) ; v3@4810,-2993 4850,-2953 v3(4850,-1178) ; R3.2@4899,-1048 4935,-1048 4990,-993 P2.3@5045,-993 ; P2.3@5080,-998 P2.3@5080,-993
  Bottom Layer w12: v9(2433,-2995) v3(4810,-2995) ; v3(4850,-1178) 4850,-1093 4940,-1003 P2.3@5055,-1003
SCK: P1.3 U5.17 U7.13 | length 863
  Top Layer w12: P1.3@1582,-3552 1557,-3527 1557,-3285 1564,-3278 1730,-3278 1832,-3380 U5.17@2091.41,-3380 ; U7.13@1640,-3279 U7.13@1646.12,-3278.9
STEUER_A+: R13.1 U5.30 | length 2650.2
  Top Layer w12: R13.1 487.6,-2697.6 551,-2761 v3@1355,-2761 ; v3@1472,-2760 2450,-2760 2474,-2784 2474,-3154 2457,-3171 U5.30@2376,-3171
  Bottom Layer w12: v3@1354,-2761 v3@1474,-2761
  other v3: 1355,-2760 1473,-2760
STEUER_A-: R22.1 R25.2 U5.10 | length 2103.7
  Top Layer w12: R25.2 372.4,-2672.4 542,-2842 1658,-2842 1956,-3140 U5.10@2048,-3140
STEUER_B+: R14.1 U5.28 | length 1723.1
  Top Layer w12: R14.1 1547.6,-2696.6 1568,-2717 2459,-2717 2502,-2760 2502,-3214 2482.25,-3233.75 U5.28
STEUER_B-: R23.1 R26.2 U5.9 | length 1088.8
  Top Layer w12: R26.2 1422.4,-2769.4 1458,-2805 1683,-2805 1985.76,-3107.76 U5.9
STEUER_C+: R36.1 U5.27 | length 920
  Top Layer w12: U5.27 2555.76,-3265.24 2597.6,-3223.4 R36.1
STEUER_C-: R40.1 R42.2 U5.13 | length 1334.7
  Top Layer w12: U5.13@2036,-3235 U5.13@2039.68,-3234.89 ; U5.13@2041,-3234 v3(2105,-3234) ; R42.2 2452.4,-2649.4 2546,-2743 2546,-3221 v3@2531,-3236
  Bottom Layer w12: v3(2105,-3234) v3@2529,-3234
  other v3: 2531,-3235
VCC: C13.2 C15.1 C28.1 C29.1 D1.1 P6.2 R29.2 R30.2 U3.1 U3.2 | length 2291.9
  Top Layer w15: C13.2@2758,-2822 U3.1@2869,-2822 ; C15.1@2862,-2730 2866,-2730 2931,-2665 3129,-2665 3148,-2646 v8@3148,-1425 ; U3.2@2866,-2873 C15.1@2866,-2732
  Top Layer w20: D1.1@3569.12,-1933.12 3569.12,-1671
  Bottom Layer w15: v8(3148,-1424) 3148,-1423 R30.2@3383,-1423
VH: C4.1 D2.2 Q1.1 Q2.1 Q16.1 R1.2 R2.2 R32.2 | length 3918.1
  Top Layer w12: C4.1@3326,-1942 C4.1@3326.94,-1942.94
  Top Layer w18: R1.2@800,-2556 800,-2591 818,-2609 v5(952,-2609) ; v5@952,-2610 952.4,-2610 Q1.1@952.4,-2558 ; R2.2@1872,-2545.4 1872,-2594 1889,-2611 v5@2018,-2611 ; v5@2017.4,-2609.6 Q2.1@2017.4,-2552 ; R32.2@2916,-2544 2916,-2596 2931,-2611 v5@3071,-2611 ; v5(3069,-2612) Q16.1@3069,-2553.24 ; v14@3240,-2578 3240,-1965 3262,-1943 C4.1@3326,-1943 ; C4.1@3326.94,-1942.94 D2.2
  Bottom Layer w18: v5@952,-2611 3209,-2611 v14@3240.5,-2579.5
  other v5: 2017,-2611
  other v14: 3240,-2579
VP: C1.1 C2.1 C14.1 R29.1 R30.1 T1.2 T3.2 T5.2 T7.2 T9.2 T11.2 U3.8 | length 2314.2
  Top Layer w15: U3.8@3072,-2823 3163,-2823 3190,-2796 3190,-933.46 3163.77,-907.23
  Top Layer w18: T5.2@1128.12,-670.12 C1.1@1128.12,-575 ; T9.2@2160.12,-670.12 C2.1@2160.12,-575 ; 3346.12,-679.12 C14.1@3346.12,-584
pads on no net: U2.5 U3.3 U3.6 U3.7 U4.5 U4.6 U4.7 U5.19 U7.3 U7.4 U7.5 U7.6 U7.10 U7.11

## Polygon pours and split planes (outlines as drawn)
GND on Top Layer "Bottom Layer-No Net" (solid, remove dead copper, pour order 1002): 4460,-905 4480,-925 4955,-925 4955,-1975 4865,-2065 4835,-2035 4555,-2035
GND on Top Layer "Bottom Layer-No Net" (solid, remove dead copper, pour order 1001): -400,200 5240,200 5240,-2000 -260,-2000
GND on Top Layer "Bottom Layer-No Net" (solid, remove dead copper, pour order 1000): -255,-1982 5368,-1982 5465,-2079 5460,-2084 5460,-4152 -117,-4152 -522,-3747
GND on Bottom Layer "Bottom Layer-No Net" (solid, remove dead copper, pour order 1004): -480,280 5460,280 5460,-2020 5380,-2100 5360,-2080 -260,-2080
GND on Bottom Layer "Bottom Layer-No Net" (solid, remove dead copper, pour order 1003): -400,-2040 -380,-2060 5540,-2060 5540,-3760 5020,-4280 4660,-3920 -740,-3920

## Keep-outs
Keep-Out Layer:
  lines w7.87: -160,-3620 -160,80 ; -120,-3660 5160,-3660 ; -120,120 5160,120 ; 5194.33,-3625.67 5194.33,85.67
  lines w8: -160,-3620 ccw(c-120,-3620) -120,-3660 ; -160,80 cw(c-120,80) -120,120 ; 5160,-3660 ccw(c5160,-3625.67) 5194.33,-3625.67 ; 5160,120 cw(c5160,85.67) 5194.33,85.67

## Other copper
Top Layer:
  rectangle net GND: 2650,-3135 2695,-3115
  rectangle net GND: 2680,-3200 2700,-3120
  rectangle net GND: 3360,-405 3735,-35
  rectangle net GND: 4915,-116 5157,91
  rectangle net GND: -112,-120 143,90
  rectangle net GND: 135,-3613 416,-3390
  rectangle net GND: 4914,-3628 5158,-3392
  rectangle net A: 255,-1556 472,-1159
  rectangle net A: 772,-1559 989,-1162
  rectangle net B: 1293,-1557 1510,-1160
  rectangle net B: 1815,-1558 2032,-1161
  rectangle net C: 2335,-1558 2552,-1161
  rectangle net C: 2855,-1534 3072,-1160
  rectangle net VCC: 3780,-808 4115,-60
  rectangle net VCC: 3688,-1567 4019,-448
  rectangle net VCC: 3288,-1712 4018,-1200
  rectangle net VP: 139,-974 3592,-672
  rectangle net GND: 4120,-2925 4225,-2785
  rectangle net GND: 4320,-3075 4450,-2985
  rectangle net GND: 4140,-3270 4210,-3145
  rectangle net GND: 3945,-3080 3985,-2995
  rectangle net GND: 270,-2070 450,-1860
  rectangle net GND: 790,-2070 990,-1860
  rectangle net GND: 1330,-2060 1480,-1870
  rectangle net GND: 1830,-2060 2020,-1860
  rectangle net GND: 2350,-2060 2530,-1870
  rectangle net GND: 2880,-2070 3050,-1880
Bottom Layer:
  rectangle net GND: 3345,-390 3735,-25
  rectangle net GND: 4889,-129 5161,89
  rectangle net GND: -112,-146 130,90
  rectangle net GND: 4899,-3621 5157,-3362
  rectangle net GND: 148,-3601 427,-3374
  rectangle net A: 65,-1688 975,-1378
  rectangle net B: 1105,-1688 2015,-1378
  rectangle net C: 2155,-1688 3065,-1378
  rectangle net C: 2275,-1658 2915,102
  rectangle net B: 1235,-1628 1885,102
  rectangle net A: 195,-1598 845,102

## Silkscreen, mask and mechanical layers (free items; w line width, h text height)
Top Overlay:
  lines w6: 40,-2510 40,-2610 45,-2610 95,-2610 95,-2497.07 cw(c112.07,-2497.07) 100,-2485 cw(c124.14,-2509.14) 124.14,-2475 245,-2475
  lines w7.87: 1515,-2790 1515,-2780 1515,-2245 1515,-2240 1655,-2240 1655,-2245 1655,-2790 1650,-2790 1645,-2790 1640,-2790 1515,-2790
  text "C" at 2130,-300 h160
  text "A" at 55,-305 h160
  text "B" at 1090,-315 h160
  text "+" at -90,-2170 h60
  text "+12V" at -110,-2930 h60 r90
  text "CANL" at -110,-3250 h60 r90
  text "CANH" at -110,-3420 h60 r90
  text "OOP V1.0" at 3995,-3610 h100
  text "MI" at 1360,-3655 h60
  text "MO" at 1450,-3655 h60
  text "CK" at 1550,-3655 h60
  text "RS" at 1755,-3655 h60
Top Solder:
  rectangle: 250,-1440 480,-1150
  rectangle: 760,-1440 1000,-1150
  rectangle: 1290,-1490 1520,-1150
  rectangle: 1810,-1450 2040,-1150
  rectangle: 2320,-1500 2570,-1150
  rectangle: 2840,-1440 3090,-1150